# EAGLE board asset-tracker-v003 (EAGLE 7.5.0)
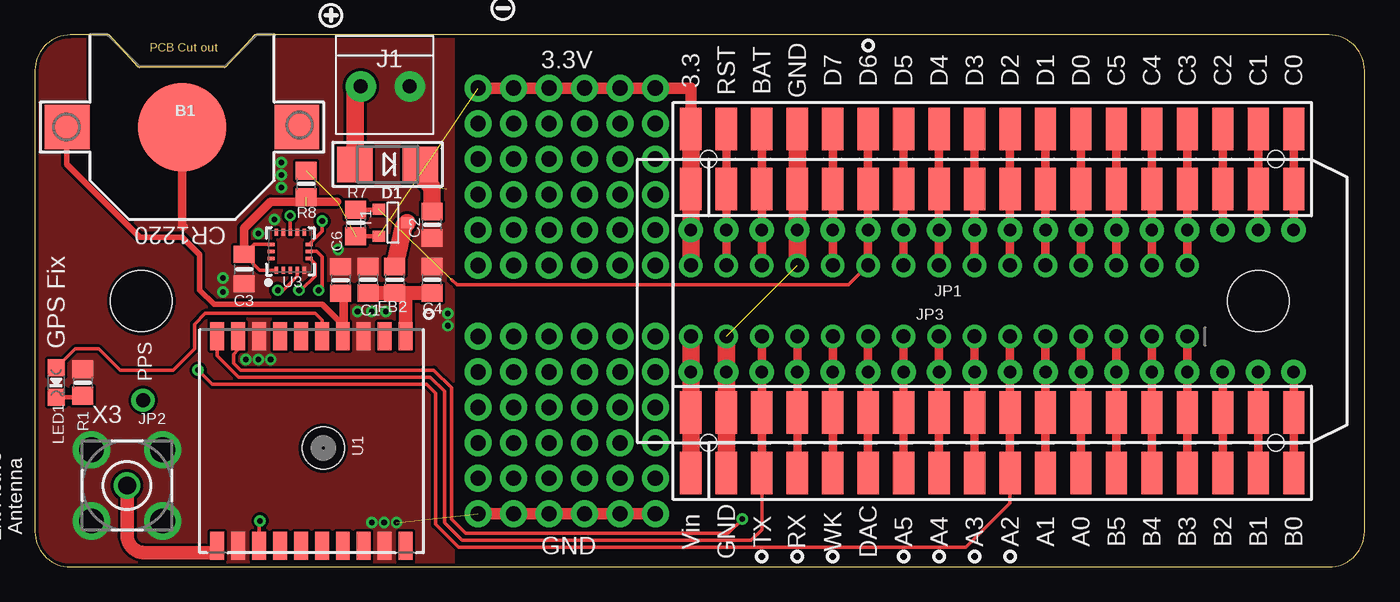
[diagram p0: board, top side]
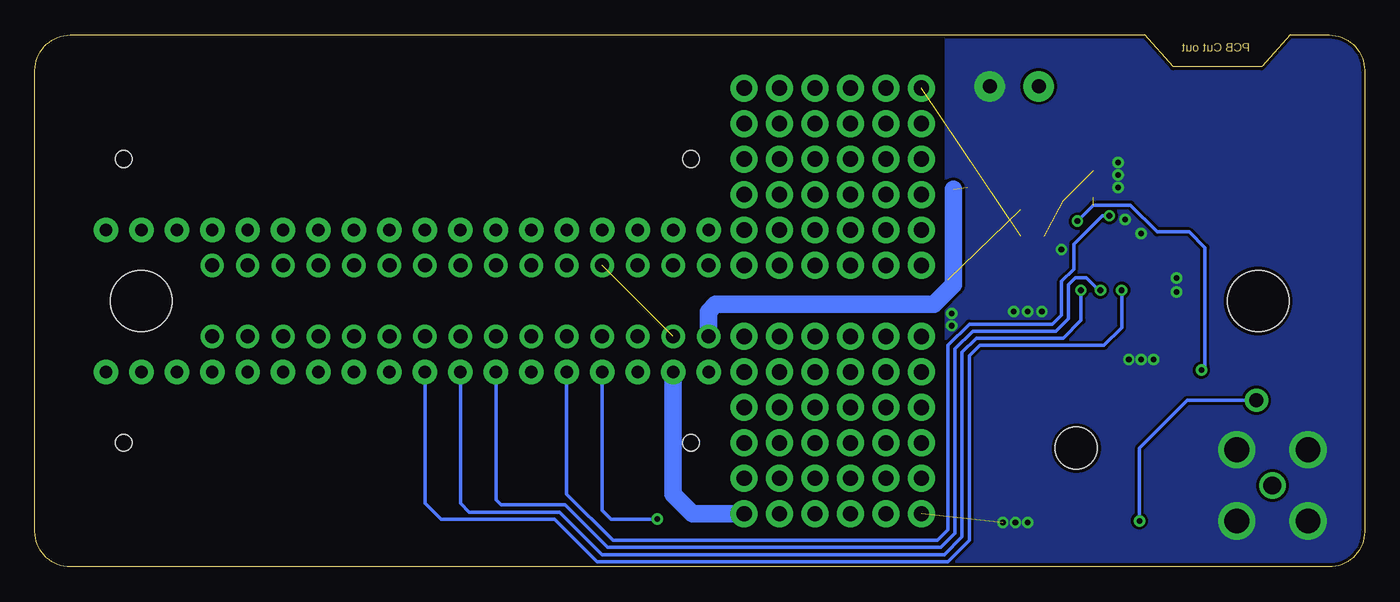
[diagram p1: board, bottom side, seen from below]

Size 95.25 x 38.1 mm. Coordinates in mm from the lower left corner, seen from the top.
Outline: 0,35.56 0,2.54 arc90 2.54,0 92.71,0 arc90 95.25,2.54 95.25,35.56 arc90 92.71,38.1 15.75,38.1 13.72,35.81 7.37,35.81 5.33,38.1 2.54,38.1 arc90 0,35.56
Copper layers (1*16): Top 0.035mm / dielectric 1.5mm / Bottom 0.035mm
Design rules "adafruit *": minimum track width 8mil, minimum drill 15.5mil, track to track 8mil, track to pad 8mil, pad to pad 8mil, via to via 8mil, smd to smd 8mil, copper to edge 10mil, drill to drill 8mil, minimum pad ring 10mil, minimum via ring 8mil, stop-mask expansion 2mil, vias tented up to drill 20mil, thermal gap 10mil
Holes 4.4 mm at 7.62,19.05 87.63,19.05
tRestrict: area 3.8,24.9 to 17,38.1

## Footprints (pad centres in the part's own frame; a part is rotated, then mirrored left to right if it is on the bottom)
CR1220 = smd 3.2 x 3.2: +$1 -8.225,0; +$2 8.225,0 | smd 6.35 x 6.35: - 0,0
0805-NO@1 = smd 1.24 x 1.5: 1 -0.95,0; 2 0.95,0
0805_10MGAP = smd 1.2 x 1.5: 1 -1.05,0; 2 1.05,0
SMADIODE = smd 2.54 x 2.54: A 2.349,0; C -2.349,0
1X2-3.5MM = drill 1 pad 2.184: 1 1.8,0; 2 -1.7,0
1X15_ROUND_70 = drill 1 pad 1.676: 1 -17.78,0; 2 -15.24,0; 3 -12.7,0; 4 -10.16,0; 5 -7.62,0; 6 -5.08,0; 7 -2.54,0; 8 0,0; 9 2.54,0; 10 5.08,0; 11 7.62,0; 12 10.16,0; 13 12.7,0; 14 15.24,0; 15 17.78,0
1X01_ROUND = drill 1 pad 1.676: 1 0,0
CHIPLED_0805_NOOUTLINE = smd 1.2 x 1.2: A 0,-1.05; C 0,1.05
0805-NO = smd 1.3 x 1.5: 1 -0.95,0; 2 0.95,0
SOT-23 = smd 0.787 x 0.889: 1 0.025,-1.016; 2 -0.94,1.016; 3 0.991,1.016
FGPMMOPA6H = smd 2 x 1: P$1 -7.5,6.75; P$2 -7.5,5.25; P$3 -7.5,3.75; P$4 -7.5,2.25; P$5 -7.5,0.75; P$6 -7.5,-0.75; P$7 -7.5,-2.25; P$8 -7.5,-3.75; P$9 -7.5,-5.25; P$10 -7.5,-6.75; P$11 7.5,-6.75; P$12 7.5,-5.25; P$13 7.5,-3.75; P$14 7.5,-2.25; P$15 7.5,-0.75; P$16 7.5,0.75; P$17 7.5,2.25; P$18 7.5,3.75; P$19 7.5,5.25; P$20 7.5,6.75 | hole 3: 0.5,0.85
LGA16_3X3MM = smd 0.5 x 0.25: 1 -1.35,1; 2 -1.35,0.5; 3 -1.35,0; 4 -1.35,-0.5; 5 -1.35,-1; 9 1.35,-1; 10 1.35,-0.5; 11 1.35,0; 12 1.35,0.5; 13 1.35,1 | smd 0.25 x 0.5: 6 -0.5,-1.35; 7 0,-1.35; 8 0.5,-1.35; 14 0.5,1.35; 15 0,1.35; 16 -0.5,1.35
ELECTRON_SMT = smd 3.048 x 1.524: 1A -12.319,21.59; 1B -8.001,21.59; 2A -12.319,19.05; 2B -8.001,19.05; 3A -12.319,16.51; 3B -8.001,16.51; 4A -12.319,13.97; 4B -8.001,13.97; 5A -12.319,11.43; 5B -8.001,11.43; 6A -12.319,8.89; 6B -8.001,8.89; 7A -12.319,6.35; 7B -8.001,6.35; 8A -12.319,3.81; 8B -8.001,3.81; 9A -12.319,1.27; 9B -8.001,1.27; 10A -12.319,-1.27; 10B -8.001,-1.27; 11A -12.319,-3.81; 11B -8.001,-3.81; 12A -12.319,-6.35; 12B -8.001,-6.35; 13A -12.319,-8.89; 13B -8.001,-8.89; 14A -12.319,-11.43; 14B -8.001,-11.43; 15A -12.319,-13.97; 15B -8.001,-13.97; 16A -12.319,-16.51; 16B -8.001,-16.51; 17A -12.319,-19.05; 17B -8.001,-19.05; 18A -12.319,-21.59; 18B -8.001,-21.59; 19A 12.319,-21.59; 19B 8.001,-21.59; 20A 12.319,-19.05; 20B 8.001,-19.05; 21A 12.319,-16.51; 21B 8.001,-16.51; 22A 12.319,-13.97; 22B 8.001,-13.97; 23A 12.319,-11.43; 23B 8.001,-11.43; 24A 12.319,-8.89; 24B 8.001,-8.89; 25A 12.319,-6.35; 25B 8.001,-6.35; 26A 12.319,-3.81; 26B 8.001,-3.81; 27A 12.319,-1.27; 27B 8.001,-1.27; 28A 12.319,1.27; 28B 8.001,1.27; 29A 12.319,3.81; 29B 8.001,3.81; 30A 12.319,6.35; 30B 8.001,6.35; 31A 12.319,8.89; 31B 8.001,8.89; 32A 12.319,11.43; 32B 8.001,11.43; 33A 12.319,13.97; 33B 8.001,13.97; 34A 12.319,16.51; 34B 8.001,16.51; 35A 12.319,19.05; 35B 8.001,19.05; 36A 12.319,21.59; 36B 8.001,21.59 | drill 0.889 pad 1.753: 1C -5.08,21.59; 2C -5.08,19.05; 3C -5.08,16.51; 4C -5.08,13.97; 5C -5.08,11.43; 6C -5.08,8.89; 7C -5.08,6.35; 8C -5.08,3.81; 9C -5.08,1.27; 10C -5.08,-1.27; 11C -5.08,-3.81; 12C -5.08,-6.35; 13C -5.08,-8.89; 14C -5.08,-11.43; 15C -5.08,-13.97; 16C -5.08,-16.51; 17C -5.08,-19.05; 18C -5.08,-21.59; 19C 5.08,-21.59; 20C 5.08,-19.05; 21C 5.08,-16.51; 22C 5.08,-13.97; 23C 5.08,-11.43; 24C 5.08,-8.89; 25C 5.08,-6.35; 26C 5.08,-3.81; 27C 5.08,-1.27; 28C 5.08,1.27; 29C 5.08,3.81; 30C 5.08,6.35; 31C 5.08,8.89; 32C 5.08,11.43; 33C 5.08,13.97; 34C 5.08,16.51; 35C 5.08,19.05; 36C 5.08,21.59 | hole 1.2: -10.16,20.32; 10.16,20.32; 10.16,-20.32; -10.16,-20.32
U.FL = smd 2.2 x 1.05: 1 0,1.375; 2 0,-1.375 | smd 0.8 x 1: 3 1.525,0
BU-SMA-V = drill 1.27: 1 0,0 | drill 1.778: 2 -2.55,2.55; 3 2.55,2.55; 4 2.55,-2.55; 5 -2.55,-2.55

## Placement (x,y rotation side)
B1  CR1220  [CR1220]  10.54,31.5 0 top
C1  0.01uF  [0805-NO@1]  23.88,20.57 90 top
C2  10uF  [0805-NO@1]  28.45,24.51 270 top
C3  0.1uF  [0805_10MGAP]  14.99,21.34 270 top
C4  10uF  [0805-NO@1]  28.45,20.57 90 top
C6  1uF  [0805-NO@1]  21.91,20.55 90 top
D1  [SMADIODE]  25.27,28.83 180 top
FB2  Ferrite  [0805-NO@1]  25.78,20.57 90 top
J1  1X2-3.5MM  [1X2-3.5MM]  25.15,34.42 180 top
JP1  [1X15_ROUND_70]  64.77,21.59 0 top
JP2  [1X01_ROUND]  7.75,11.94 0 top
JP3  [1X15_ROUND_70]  64.77,16.51 180 top
LED1  RED  [CHIPLED_0805_NOOUTLINE]  1.52,13.21 180 top
R1  470-1K  [0805-NO]  3.43,13.21 270 top
R7  2K2  [0805-NO]  22.99,24.64 270 top
R8  10K  [0805-NO]  19.43,27.43 90 top
T1  DMG3415  [SOT-23]  25.65,24.64 90 top
U1  FGPMMOPA6H  [FGPMMOPA6H]  19.81,9.02 270 top
U3  LIS3DHTR  [LGA16_3X3MM]  18.29,22.61 90 top
U$13  [SYMBOL_MINUS]  33.53,40.01 0 top
U$21  [SYMBOL_PLUS]  21.21,39.5 0 top
X1  ELECTRON  [ELECTRON_SMT]  68.58,19.05 90 top
X2  uFL  [U.FL]  -7.62,4.32 0 top  (outside the outline)
X3  BU-SMA-V  [BU-SMA-V]  6.6,5.84 0 top

## Library data of the parts
B1 C1-C4 C6 D1 FB2 JP1-JP3 LED1 R1 R7 R8 U1 U3 U$13 U$21 X1 X2 = microbuilder
J1 = adafruit2
T1 = zetex; OC_FARNELL: unknown; OC_NEWARK: unknown
X3 = con-coax; OC_FARNELL: unknown; OC_NEWARK: unknown

## Nets
1PPS: JP2.1 U1.P$13
3.3V: C3.1 JP1.1 R7.2 R8.2 T1.2 U3.1 U3.14 X1.36A X1.36B X1.36C
A0: JP3.4 X1.12A X1.12B X1.12C
A1: JP3.5 X1.11A X1.11B X1.11C
ACCEL_CS: JP3.6 R8.1 U3.8 X1.10A X1.10B X1.10C
ACCEL_INT1: JP3.11 U3.11 X1.5A X1.5B X1.5C
ACCEL_MISO: JP3.8 U3.7 X1.8A X1.8B X1.8C
ACCEL_MOSI: JP3.9 U3.6 X1.7A X1.7B X1.7C
ACCEL_SCK: JP3.7 U3.4 X1.9A X1.9B X1.9C
B3: JP3.1 X1.15A X1.15B X1.15C
B4: JP3.2 X1.14A X1.14B X1.14C
B5: JP3.3 X1.13A X1.13B X1.13C
C3: JP1.15 X1.22A X1.22B X1.22C
C4: JP1.14 X1.23A X1.23B X1.23C
C5: JP1.13 X1.24A X1.24B X1.24C
D0: JP1.12 X1.25A X1.25B X1.25C
D1: JP1.11 X1.26A X1.26B X1.26C
D2: JP1.10 X1.27A X1.27B X1.27C
D3: JP1.9 X1.28A X1.28B X1.28C
D4: JP1.8 X1.29A X1.29B X1.29C
D5: JP1.7 X1.30A X1.30B X1.30C
D6: JP1.6 R7.1 T1.3 X1.31A X1.31B X1.31C
D7: JP1.5 X1.32A X1.32B X1.32C
DAC: JP3.10 X1.6A X1.6B X1.6C
FIX: LED1.A U1.P$5
GND: B1.- C1.2 C2.2 C3.2 C4.2 C6.2 J1.2 JP1.4 JP3.14 R1.1 U1.P$3 U1.P$8 U1.P$12 U1.P$19 U3.5 U3.10 U3.12 X1.2A X1.2B X1.2C X1.33A X1.33B X1.33C X3.2 X3.3 X3.4 X3.5
N$1: C1.1 C4.1 FB2.1 U1.P$1
N$2: LED1.C R1.2
N$4: U1.P$11 X3.1
N$8: C2.1 D1.C JP3.15 X1.1A X1.1B X1.1C
N$9: D1.A J1.1
N$10: X1.16A X1.16B X1.16C
N$11: X1.17A X1.17B X1.17C
N$12: X1.18A X1.18B X1.18C
N$13: X1.21A X1.21B X1.21C
N$14: X1.20A X1.20B X1.20C
N$15: X1.19A X1.19B X1.19C
RST: JP1.2 X1.35A X1.35B X1.35C
RX: JP3.13 U1.P$10 X1.3A X1.3B X1.3C
TX: JP3.12 U1.P$9 X1.4A X1.4B X1.4C
VBACKUP: B1.+$1 C6.1 U1.P$4
VBAT: JP1.3 X1.34A X1.34B X1.34C
VCC: FB2.2 T1.1

## Tracks (layer width: path | path; a pad name or v marks a point on that pad's centre or on a via)
1PPS  (via drill 0.41)
  Top 0.254: U1.P$13 16.06,3.23 v16.13,3.3
  Bottom 0.254: v16.13,3.3 16.13,8.51 12.7,11.94 JP2.1
3.3V  (via drill 1.1 pad 1.93)  (3 unrouted)
  Top 0.254: U3.1 16.12,21.26 C3.1 15.71,23.11 U3.14
  Top 0.305: T1.2 24.63,23.69 R7.2
  Top 0.61: C3.1 14.99,24.26 16.89,26.16 21.65,26.16
  Top 0.813: v31.75,34.29 v34.29,34.29 v36.83,34.29 v39.37,34.29 v41.91,34.29 v44.45,34.29 46.99,34.29 X1.36A
  Top 1.27: X1.36A X1.36B X1.36C JP1.1
A0
  Top 0.61: X1.12A X1.12B X1.12C JP3.4
A1
  Top 0.61: JP3.5 X1.11C X1.11B X1.11A
ACCEL_CS  (via drill 0.41)  (1 unrouted)
  Top 0.254: X1.10A 69.85,4.57 66.67,1.4 30.35,1.4 28.7,3.05 28.7,12.45 28.07,13.08 12.7,13.08 v11.68,14.1 | U3.8 20.57,24.04 v20.57,24.77
  Top 0.61: X1.10A X1.10B X1.10C JP3.6
  Bottom 0.254: v11.68,14.1 11.43,14.35 11.43,22.86 12.57,24 14.86,24 16.76,25.91 19.43,25.91 v20.57,24.77
ACCEL_INT1  (via drill 0.41)
  Top 0.254: v18.29,25.15 U3.11
  Top 0.61: X1.5A X1.5B X1.5C JP3.11
  Bottom 0.254: X1.5C 57.15,5.21 53.85,1.91 30.61,1.91 29.84,2.67 29.84,15.88 28.32,17.4 22.35,17.4 21.72,18.03 21.72,20.45 20.83,21.34 20.83,23.11 18.8,25.15 v18.29,25.15
ACCEL_MISO  (via drill 0.41)
  Top 0.254: X1.8A 64.64,6.6 | U3.7 20.19,22.61 20.57,22.23 20.57,20.07 v20.32,19.81
  Top 0.61: X1.8A X1.8B X1.8C JP3.8
  Bottom 0.254: X1.8C 64.77,4.57 64.14,3.94 57.66,3.94 54.61,0.89 30.1,0.89 28.83,2.16 28.83,15.37 27.81,16.38 21.59,16.38 20.32,17.65 v20.32,19.81
ACCEL_MOSI  (via drill 0.41)
  Top 0.254: U3.6 19.68,22.11 20.07,21.72 20.07,20.83 19.05,19.81 v18.92,19.81
  Top 0.61: X1.7A X1.7B X1.7C JP3.9
  Bottom 0.254: X1.7C 62.23,4.83 61.85,4.45 57.28,4.45 54.23,1.4 30.35,1.4 29.34,2.41 29.34,15.62 28.07,16.89 22.1,16.89 21.21,17.78 21.21,20.19 20.7,20.7 19.94,20.7 19.05,19.81 v18.92,19.81
ACCEL_SCK  (via drill 0.41)
  Top 0.254: U3.4 18.79,20.82 17.78,19.81 v17.4,19.81
  Top 0.61: X1.9A X1.9B X1.9C JP3.7
  Bottom 0.254: X1.9C 67.31,4.57 66.17,3.43 58.04,3.43 54.99,0.38 29.84,0.38 28.32,1.91 28.32,15.11 27.56,15.88 18.67,15.88 17.4,17.14 v17.4,19.81
B3
  Top 0.61: JP3.1 X1.15C X1.15B 82.55,7.75 82.68,7.75 82.68,6.73 X1.15A
B4
  Top 0.61: X1.14A X1.14B X1.14C JP3.2
B5
  Top 0.61: JP3.3 X1.13C X1.13B X1.13A
C3
  Top 0.61: JP1.15 X1.22C X1.22B X1.22A
C4
  Top 0.61: X1.23A X1.23B X1.23C JP1.14
C5
  Top 0.61: JP1.13 X1.24C X1.24B X1.24A
D0
  Top 0.61: X1.25A X1.25B X1.25C JP1.12
D1
  Top 0.61: JP1.11 X1.26C X1.26B X1.26A
D2
  Top 0.61: X1.27A X1.27B X1.27C JP1.10
D3
  Top 0.61: X1.28A X1.28B X1.28C JP1.9
D4
  Top 0.61: JP1.8 X1.29C X1.29B X1.29A
D5
  Top 0.61: X1.30A X1.30B X1.30C JP1.7
D6  (1 unrouted)
  Top 0.254: JP1.6 58.29,20.19 30.23,20.19 29.84,20.57
  Top 0.305: T1.3 24.6,25.59 R7.1
  Top 0.61: JP1.6 X1.31C X1.31B X1.31A
  Bottom 0.254: 59.69,23.62 X1.31C
D7
  Top 0.61: JP1.5 X1.32C X1.32B X1.32A
DAC
  Top 0.61: X1.6A X1.6B X1.6C JP3.10
FIX
  Top 0.254: U1.P$5 20.56,17.66 20.07,18.16 12.19,18.16 11.43,17.4 11.43,15.62 9.91,14.1 6.1,14.1 4.57,15.62 2.89,15.62 LED1.A
GND  (via drill 0.41, 1.1 pad 1.93)  (2 unrouted)
  Top 0.61: X1.33A 54.48,31.5 | B1.- 10.54,24.51 arc90 10.67,24.38
  Top 0.813: v44.45,3.81 v41.91,3.81 v39.37,3.81 v36.83,3.81 v34.29,3.81 v31.75,3.81
  Top 1.27: X1.33A X1.33B X1.33C JP1.4 | X1.2A X1.2B X1.2C JP3.14
  Bottom 1.27: v44.45,3.81 48.13,3.81 49.53,5.21 X1.2C
  other vias: 13.46,19.68 13.46,20.7 23.11,18.29 24.13,18.29 25.15,18.29 25.02,3.17 24.13,3.17 25.91,3.17 17.65,27.18 17.65,28.07 17.65,28.96 29.59,18.16 29.59,17.27 21.72,22.73 16,14.86 16.89,14.86 15.11,14.86 16,23.88 17.14,24.89
  pour Top (no thermals): 0,0 29.97,0 29.97,38.1 0,38.1
  pour Bottom (no thermals): 0,0 29.97,0 29.97,38.1 0,38.1
N$1
  Top 0.406: C4.1 25.97,19.62 26.54,19.05
  Top 0.965: U1.P$1 26.54,16.54 26.54,19.05
  Top 1.016: FB2.1 C4.1 C1.1
N$2
  Top 0.305: LED1.C 3.33,12.16 R1.2
N$3  (via drill 1.1 pad 1.93)
  other vias: 44.45,24.13
N$4
  Top 0.965: X3.1 6.6,2.29 arc90 7.87,1.02 12.56,1.02 arc90 U1.P$11
N$5  (via drill 1.1 pad 1.93)
  other vias: 44.45,26.67
N$6  (via drill 1.1 pad 1.93)
  other vias: 44.45,29.21
N$7  (via drill 1.1 pad 1.93)
  other vias: 44.45,31.75
N$8  (1 unrouted)
  Top 1.27: X1.1A X1.1B X1.1C JP3.15 | D1.C 27.62,28 28.45,27.18 C2.1
  Bottom 1.27: JP3.15 46.99,18.29 46.48,18.8 30.86,18.8 29.46,20.19 29.46,27.05
N$9
  Top 1.27: J1.1 22.92,33.99 D1.A
N$10
  Top 0.61: X1.16C X1.16B X1.16A
N$11
  Top 0.61: X1.17A X1.17B X1.17C
N$12
  Top 0.61: X1.18C X1.18B X1.18A
N$13
  Top 0.61: X1.21A X1.21B X1.21C
N$14
  Top 0.61: X1.20C X1.20B X1.20A
N$15
  Top 0.61: X1.19A X1.19B X1.19C
N$21  (via drill 1.1 pad 1.93)
  other vias: 41.91,31.75
N$22  (via drill 1.1 pad 1.93)
  other vias: 41.91,29.21
N$23  (via drill 1.1 pad 1.93)
  other vias: 41.91,26.67
N$24  (via drill 1.1 pad 1.93)
  other vias: 41.91,24.13
N$25  (via drill 1.1 pad 1.93)
  other vias: 39.37,24.13
N$26  (via drill 1.1 pad 1.93)
  other vias: 39.37,26.67
N$27  (via drill 1.1 pad 1.93)
  other vias: 39.37,29.21
N$28  (via drill 1.1 pad 1.93)
  other vias: 39.37,31.75
N$29  (via drill 1.1 pad 1.93)
  other vias: 36.83,31.75
N$30  (via drill 1.1 pad 1.93)
  other vias: 36.83,29.21
N$31  (via drill 1.1 pad 1.93)
  other vias: 36.83,26.67
N$32  (via drill 1.1 pad 1.93)
  other vias: 36.83,24.13
N$33  (via drill 1.1 pad 1.93)
  other vias: 34.29,24.13
N$34  (via drill 1.1 pad 1.93)
  other vias: 34.29,26.67
N$35  (via drill 1.1 pad 1.93)
  other vias: 34.29,29.21
N$36  (via drill 1.1 pad 1.93)
  other vias: 34.29,31.75
N$37  (via drill 1.1 pad 1.93)
  other vias: 31.75,31.75
N$38  (via drill 1.1 pad 1.93)
  other vias: 31.75,29.21
N$39  (via drill 1.1 pad 1.93)
  other vias: 31.75,26.67
N$40  (via drill 1.1 pad 1.93)
  other vias: 31.75,24.13
N$41  (via drill 1.1 pad 1.93)
  other vias: 31.75,21.59
N$42  (via drill 1.1 pad 1.93)
  other vias: 34.29,21.59
N$43  (via drill 1.1 pad 1.93)
  other vias: 36.83,21.59
N$44  (via drill 1.1 pad 1.93)
  other vias: 39.37,21.59
N$45  (via drill 1.1 pad 1.93)
  other vias: 41.91,21.59
N$46  (via drill 1.1 pad 1.93)
  other vias: 44.45,21.59
N$48  (via drill 1.1 pad 1.93)
  other vias: 44.45,16.51
N$49  (via drill 1.1 pad 1.93)
  other vias: 44.45,13.97
N$50  (via drill 1.1 pad 1.93)
  other vias: 44.45,11.43
N$51  (via drill 1.1 pad 1.93)
  other vias: 44.45,8.89
N$52  (via drill 1.1 pad 1.93)
  other vias: 44.45,6.35
N$61  (via drill 1.1 pad 1.93)
  other vias: 31.75,6.35
N$62  (via drill 1.1 pad 1.93)
  other vias: 31.75,8.89
N$63  (via drill 1.1 pad 1.93)
  other vias: 31.75,11.43
N$64  (via drill 1.1 pad 1.93)
  other vias: 31.75,13.97
N$65  (via drill 1.1 pad 1.93)
  other vias: 31.75,16.51
N$68  (via drill 1.1 pad 1.93)
  other vias: 34.29,16.51
N$69  (via drill 1.1 pad 1.93)
  other vias: 34.29,13.97
N$70  (via drill 1.1 pad 1.93)
  other vias: 34.29,11.43
N$71  (via drill 1.1 pad 1.93)
  other vias: 34.29,8.89
N$72  (via drill 1.1 pad 1.93)
  other vias: 34.29,6.35
N$77  (via drill 1.1 pad 1.93)
  other vias: 41.91,6.35
N$78  (via drill 1.1 pad 1.93)
  other vias: 41.91,8.89
N$79  (via drill 1.1 pad 1.93)
  other vias: 41.91,11.43
N$80  (via drill 1.1 pad 1.93)
  other vias: 41.91,13.97
N$81  (via drill 1.1 pad 1.93)
  other vias: 41.91,16.51
N$85  (via drill 1.1 pad 1.93)
  other vias: 36.83,16.51
N$86  (via drill 1.1 pad 1.93)
  other vias: 39.37,16.51
N$87  (via drill 1.1 pad 1.93)
  other vias: 39.37,13.97
N$88  (via drill 1.1 pad 1.93)
  other vias: 36.83,13.97
N$89  (via drill 1.1 pad 1.93)
  other vias: 36.83,11.43
N$90  (via drill 1.1 pad 1.93)
  other vias: 39.37,11.43
N$91  (via drill 1.1 pad 1.93)
  other vias: 39.37,8.89
N$92  (via drill 1.1 pad 1.93)
  other vias: 36.83,8.89
N$93  (via drill 1.1 pad 1.93)
  other vias: 36.83,6.35
N$94  (via drill 1.1 pad 1.93)
  other vias: 39.37,6.35
RST
  Top 0.61: X1.35A X1.35B X1.35C JP1.2
RX
  Top 0.254: X1.3A 52.07,2.67 51.31,1.91 30.61,1.91 29.34,3.17 29.34,12.57 28.32,13.59 14.61,13.59 13.06,15.13 U1.P$10
  Top 0.61: X1.3A X1.3B X1.3C JP3.13
TX  (via drill 0.41)
  Top 0.254: v50.67,3.43 49.66,2.41 30.86,2.41 29.84,3.43 29.84,12.83 28.57,14.1 14.73,14.1 14.22,14.61 14.22,15.24 14.56,15.58 U1.P$9
  Top 0.61: X1.4A X1.4B X1.4C JP3.12
  Bottom 0.254: v50.67,3.43 53.98,3.43 54.61,4.06 X1.4C
VBACKUP
  Top 0.406: 22.29,19.24 C6.1 | 22.1,17.65 21.72,17.65 20.57,18.8 12.83,18.8 11.81,19.81 11.81,22.35 10.54,23.62 7.49,23.62 2.29,28.83 2.29,31.47 B1.+$1
  Top 0.61: U1.P$4 22.1,16.55 22.1,17.65 22.1,19.41 C6.1
VBAT
  Top 0.61: X1.34A X1.34B X1.34C JP1.3
VCC
  Top 1.27: T1.1 26.42,24.41 FB2.2

## Text on the board
Dimension: PCB Cut out
tPlace: 3.3V | 3.3 | RST | BAT | GND | D7 | D6 | D5 | D4 | D3 | D2 | D1 | D0 | C5 | C4 | C3 | C2 | C1 | C0 | Y | GPS pwr | X | CR1220 | GPS Fix | PPS | Ext Active / Antenna | Vin | GND | TX | RX | WK | DAC | A5 | A4 | A3 | A2 | A1 | A0 | B5 | B4 | B3 | B2 | B1 | B0 | GND
tDocu: Reference Designs ARE PROVIDED "AS IS" AND "WITH ALL FAULTS. PARTICLE INDUSTRIES, INC / ("PARTICLE") DISCLAIMS ALL OTHER WARRANTIES, EXPRESS OR IMPLIED, REGARDING / PRODUCTS OR THE REFERENCE DESIGNS, INCLUDING BUT NOT LIMITED TO, ANY / IMPLIED WARRANTIES OF MERCHANTABILITY, FITNESS FOR A PARTICULAR PURPOSE, / OR NON-INFRINGEMENT. / / Particle may make changes to specifications and product descriptions at any / time, without notice. The Customer must not rely on the absence or / characteristics of any features or instructions marked "reserved" or / "undefined." Particle reserves these for future definition and shall have / no responsibility whatsoever for conflicts or incompatibilities arising / from future changes to them. The product information on the Web Site or / Materials is subject to change without notice. Do not finalize a design / with this information. / Particle is a registered trademark.